# Altium PCB PCB2.PcbDoc (part 1 of 3)
Units mil, origin at the board's own origin, x right, y up, seen from the top; angles counter-clockwise.
Board outline 9010 x 4600 mil, 2 copper layers (Top Layer, Bottom Layer); 234 components, 289 nets, 937 pads, 186 vias.
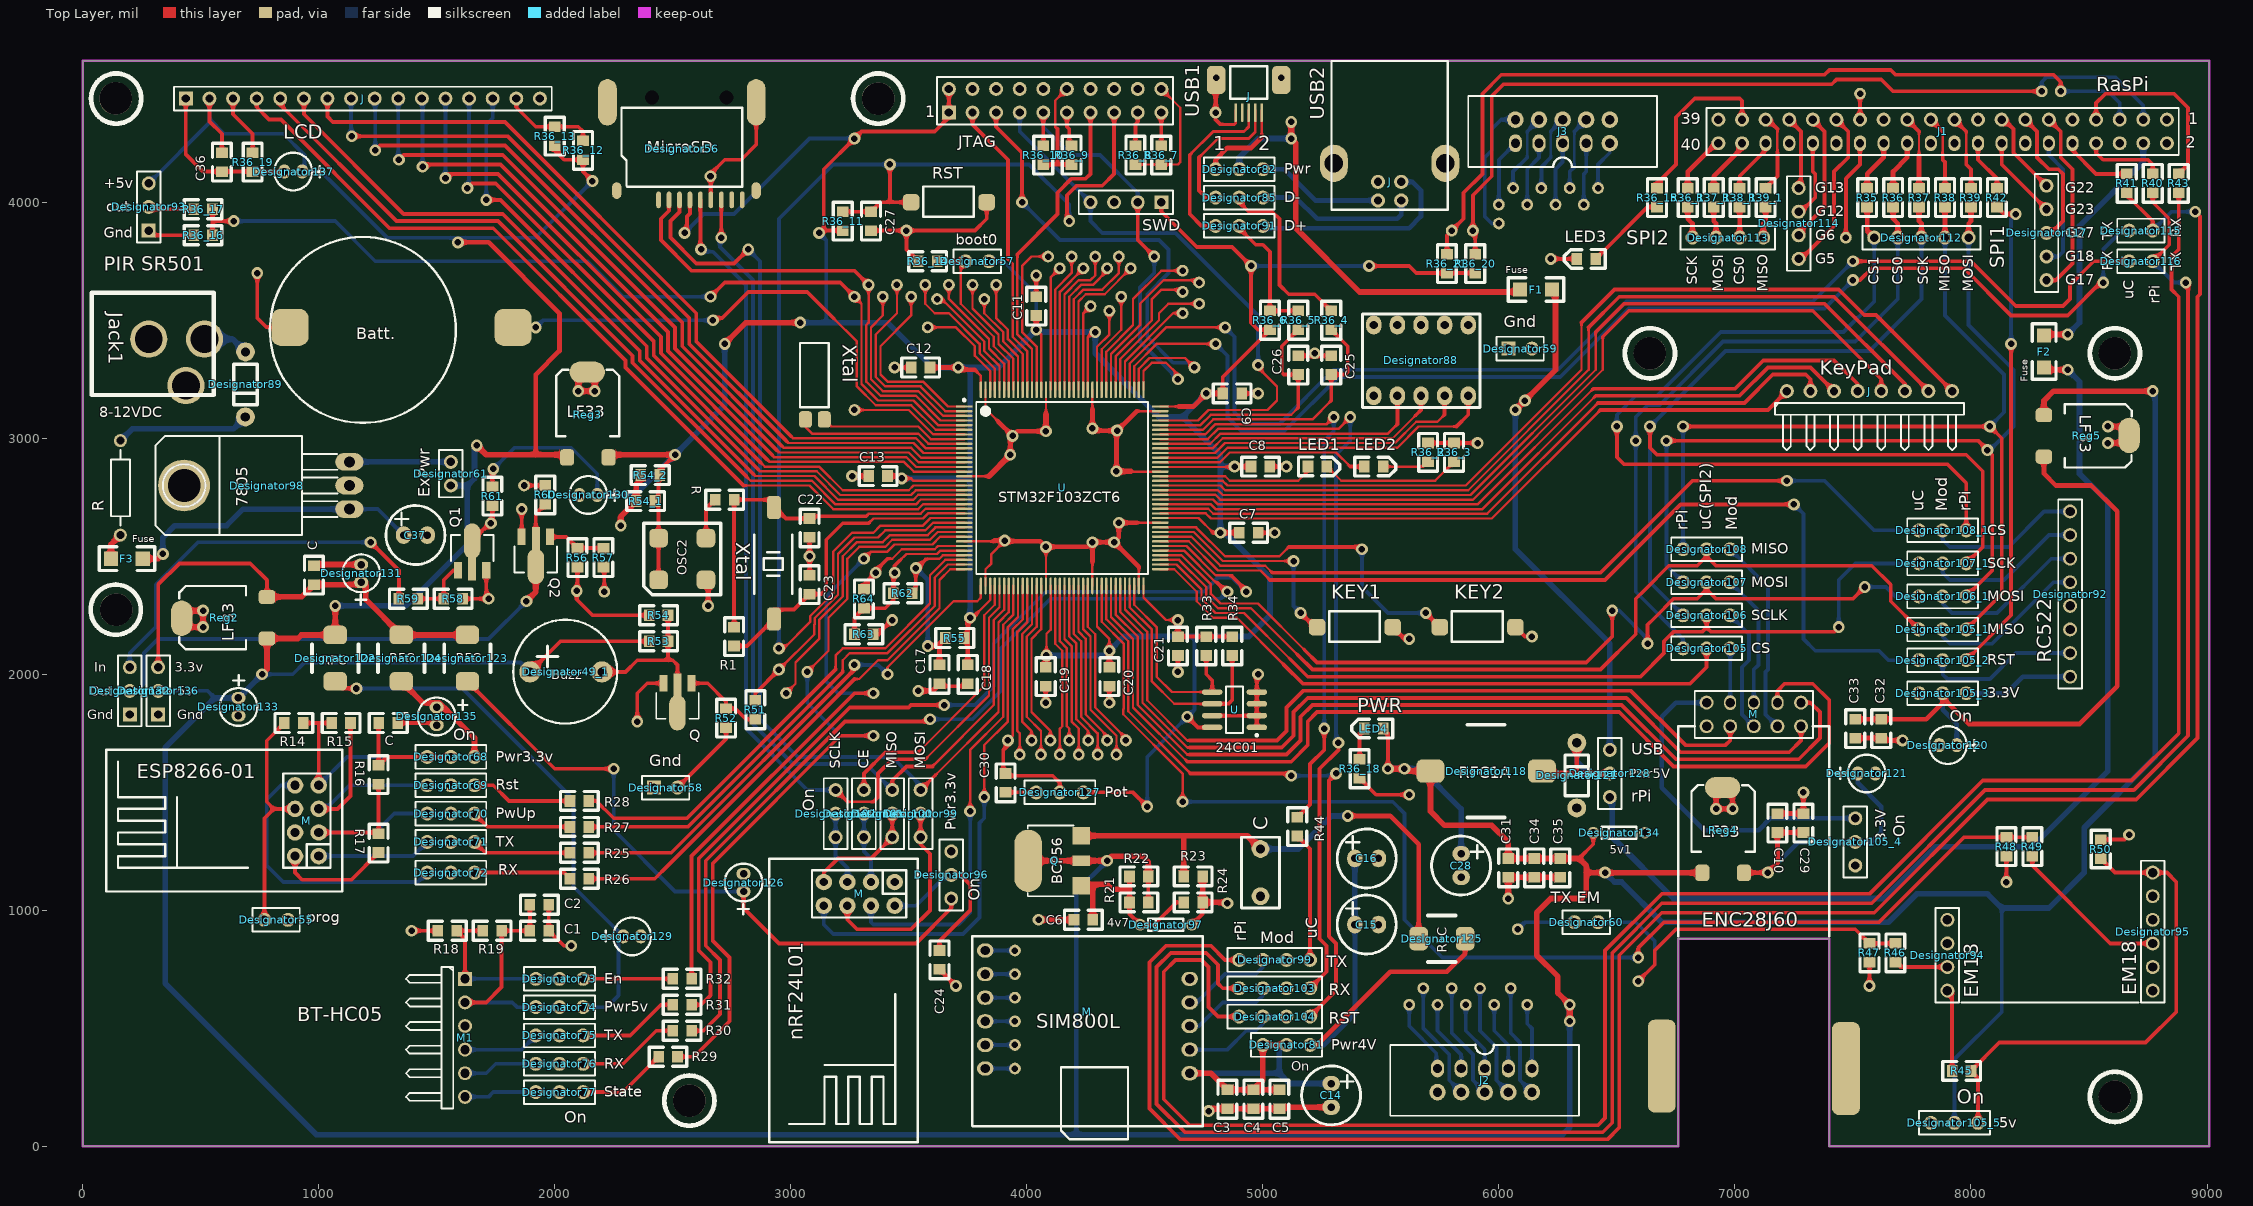
[diagram p0: Top Layer view]
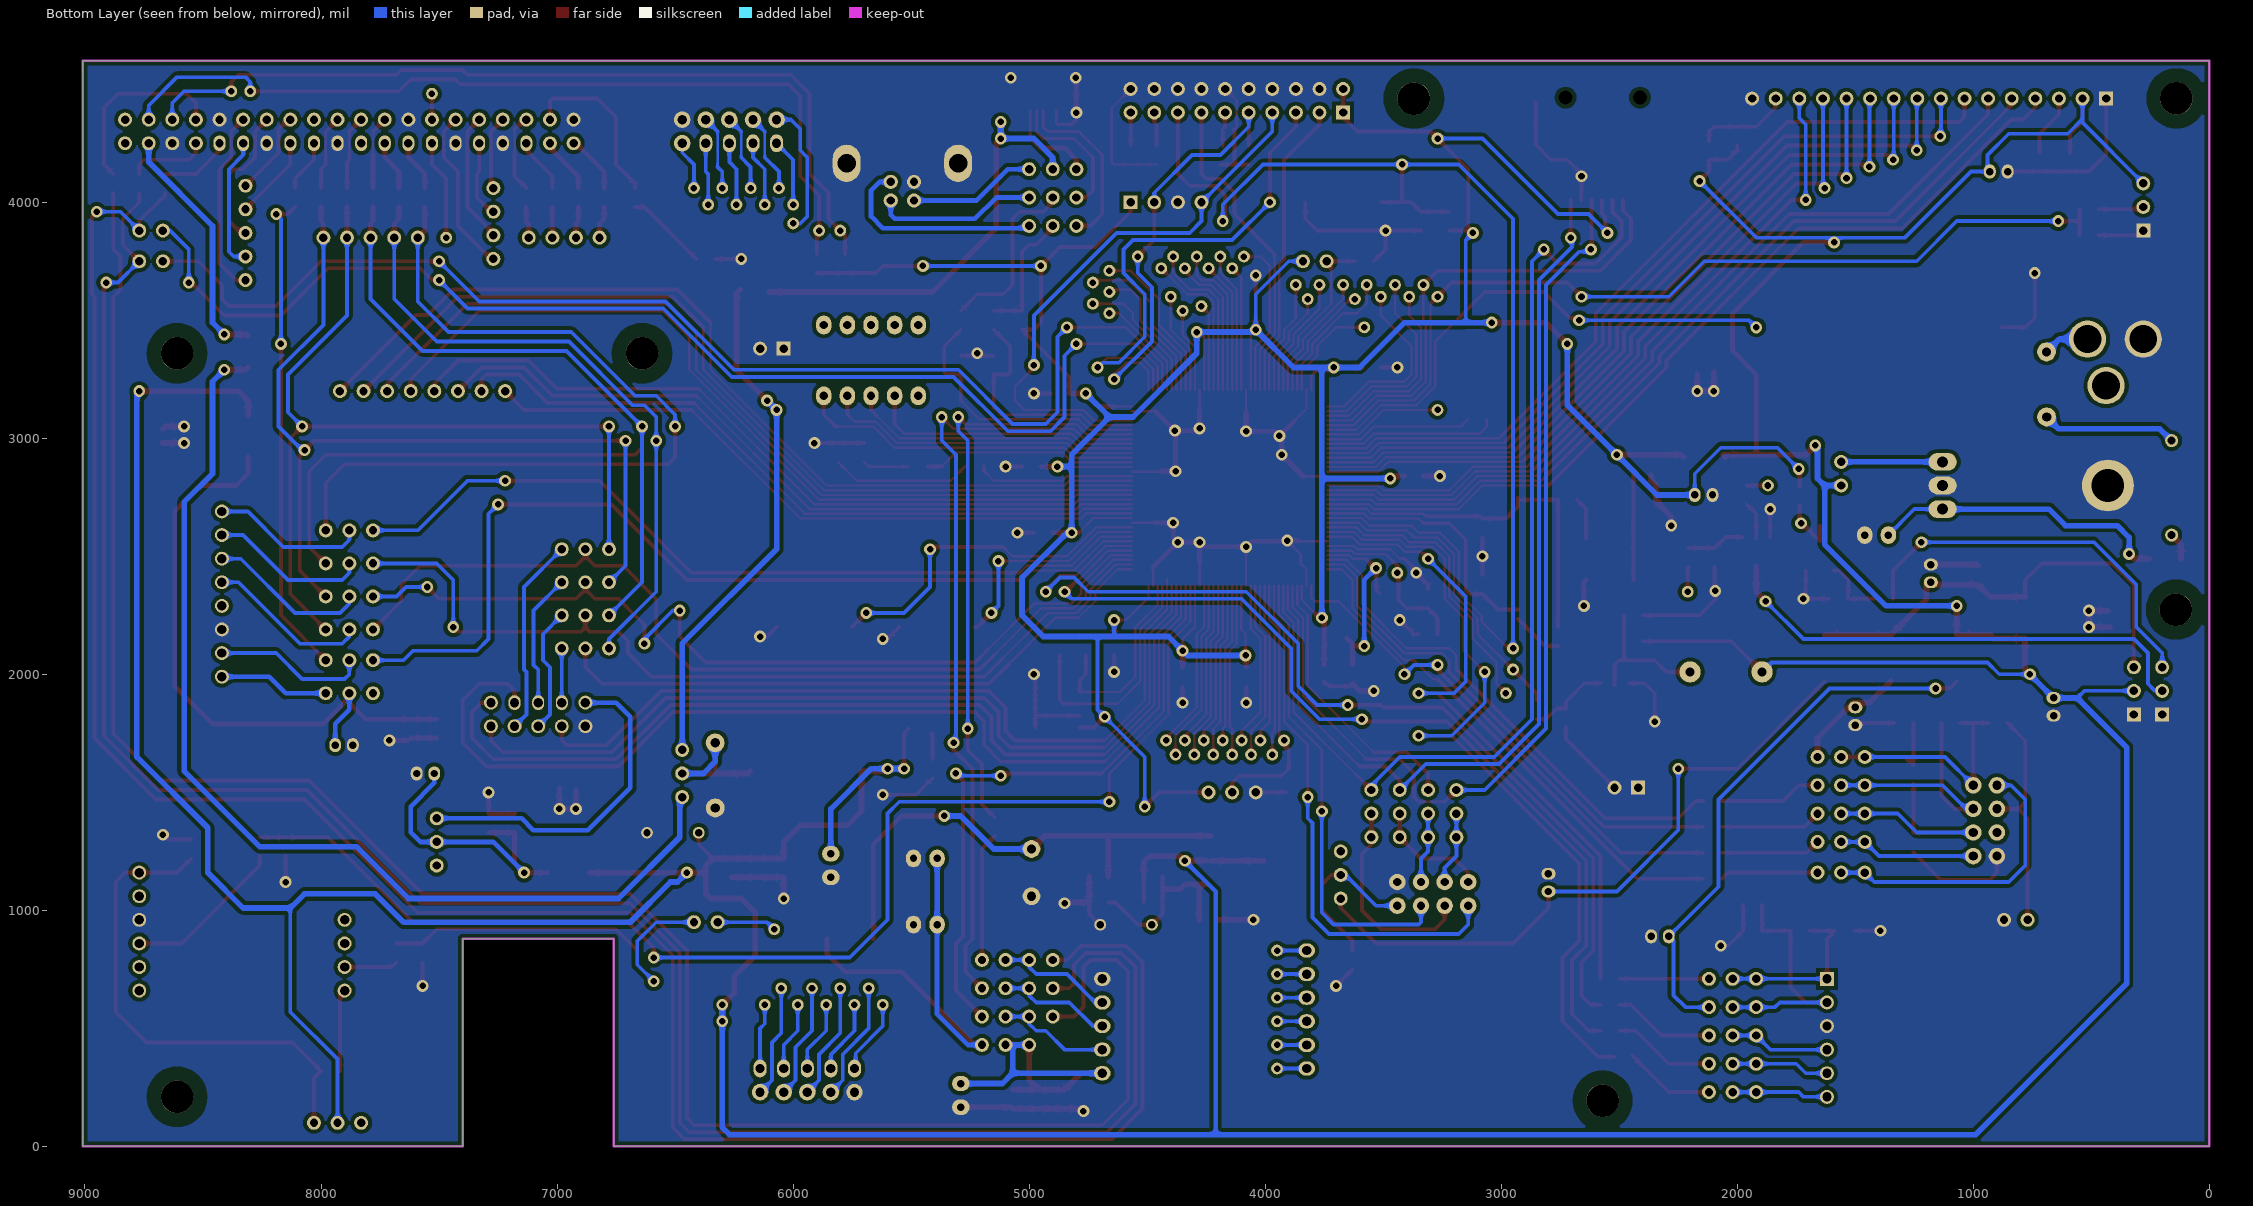
[diagram p1: Bottom Layer view, seen from below]

## Layer stack, top to bottom
Top Solder: solder mask 0.4, Solder Resist, Dk 3.5
Top Layer: signal copper 1.4
Dielectric 1: dielectric 12.6, FR-4, Dk 4.8
Bottom Layer: signal copper 1.4
Bottom Solder: solder mask 0.4, Solder Resist, Dk 3.5

## Board outline
0,0 0,4600 9010,4600 9010,0 7400,0 7400,880 6760,880 6760,0 0,0

## Design rules (kind name [scope] priority, off if disabled: settings)
AssemblyTestPointUsage [All] p1: allowmultiple=TRUE
Clearance PolygonHoldersClearance [InNetClass('Holders')] p1: gap=59.06
Clearance PolygonClearance [InNet('Ground') And OnLayer('Bottom Layer')] p2: gap=16
Clearance [All] p3: gap=9
HoleSize [All] p1: absolutevalues=TRUE maxlimit=500 minlimit=1 maxpercent=80.000 minpercent=20.000
HoleToHoleClearance [All] p1: gap=20 allowstackedmicrovias=TRUE
MinimumSolderMaskSliver [All] p1: minsoldermaskwidth=0
NetAntennae [All] p1: netantennaetolerance=5
PolygonConnect [All] p1: connectstyle=Direct reliefconductorwidth=16 reliefentries=4 polygonreliefangle="90 Angle" airgapwidth=10
RoutingVias [All] p1: holewidth=28 width=50 viastyle="Through Hole" minholewidth=28 minwidth=50 maxholewidth=28 maxwidth=50
SilkToSilkClearance [All] p1: silktosilkclearance=1
SilkToSolderMaskClearance [IsPad] p1: minsilkscreentomaskgap=0 clearancetoexposedcopper=TRUE
SolderMaskExpansion [All] p1: expansion=2
UnpouredPolygon [All] p1: allowunpoured=FALSE
Width [All] p1: maxlimit=100 minlimit=10 preferedwidth=10
22 further rules are at their usual default settings.

## Classes and differential pairs
net class Holders: holder1 holder2 holder3 holder4 holder5 holder6 holder7 holder8

## Components (designator, comment, footprint, x,y, rotation, side; value= is the part's Value field where it differs from the comment)
Batt. "Comment" Batt_holder_smd2 800,3470 r0 top
C "22R" SMD0805 1254.88,1793.86 r0 top
C "22R" SMD0805 980,2380 r90 top
C "Comment" MKT_2 4990,1260 r270 top
C1 "22R" SMD0805 1894.88,913.86 r0 top
C2 "22R" SMD0805 1894.88,1023.86 r0 top
C3 "22R" SMD0805 4850,240 r270 top
C4 "22R" SMD0805 4960,240 r270 top
C5 "22R" SMD0805 5070,240 r270 top
C6 "22R" SMD0805 4200,960 r0 top
C7 "22R" SMD0805 4980,2600 r180 top
C8 "22R" SMD0805 4950,2880 r0 top
C9 "22R" SMD0805 4910,3190 r180 top
C10 "22R" SMD0805 7180,1410 r270 top
C11 "22R" SMD0805 4040,3600 r270 top
C12 "22R" SMD0805 3590,3300 r180 top
C13 "22R" SMD0805 3330,2840 r0 top
C14 "Comment" CAP_1.0 5289.33,216.34 r270 top
C15 "Comment" CAP_1.0 5440,940 r0 top
C16 "Comment" CAP_1.0 5440,1220 r0 top
C17 "22R" SMD0805 3630,2040 r270 top
C18 "22R" SMD0805 3750,1960 r90 top
C19 "22R" SMD0805 4080,1950 r90 top
C20 "22R" SMD0805 4350,1950 r90 top
C21 "22R" SMD0805 4640,2080 r90 top
C22 "22R" SMD0805 3080,2580 r90 top
C23 "22R" SMD0805 3080,2340 r90 top
C24 "22R" SMD0805 3630,750 r90 top
C25 "47p" SMD0805 5290,3350 r270 top
C26 "47p" SMD0805 5150,3350 r270 top
C27 "100nF" SMD0805 3340,3960 r270 top
C28 "Comment" CAP_1.0 5840,1190 r270 top
C29 "22R" SMD0805 7290,1410 r270 top
C30 "22R" SMD0805 3910,1500 r90 top
C31 "22R" SMD0805 6040,1220 r270 top
C32 "22R" SMD0805 7620,1730 r90 top
C33 "22R" SMD0805 7510,1730 r90 top
C34 "22R" SMD0805 6150,1220 r270 top
C35 "22R" SMD0805 6260,1220 r270 top
C36 "22R" SMD0805 590,4130 r90 top
C37 "Comment" CAP_1.0 1410,2590 r0 top
Designator49_1 "Buzz" BUZZER 2160,2010 r270 top
Designator55 "prog" HDR1X2#1 770,960 r0 top
Designator56 "MicroSD" microSD 2440,4010 r0 top
Designator57 "boot0" HDR1X2#1 3740,3750 r0 top
Designator58 "Gnd" HDR1X2#2 2420,1520 r0 top
Designator59 "Gnd" HDR1X2#2 6040,3380 r0 top
Designator60 "TX EM" HDR1X2#1 6320,950 r0 top
Designator61 "ExPwr" HDR1X2#1 1560,2800 r90 top
Designator68 "Pwr3.3v" HDR1X3#1 1460,1650 r0 top
Designator69 "Rst" HDR1X3#1 1460,1530 r0 top
Designator70 "PwUp" HDR1X3#1 1460,1410 r0 top
Designator71 "TX" HDR1X3#1 1460,1290 r0 top
Designator72 "RX" HDR1X3#1 1460,1160 r0 top
Designator73 "En" HDR1X3#1 1920,710 r0 top
Designator74 "Pwr5v" HDR1X3#1 1920,590 r0 top
Designator75 "TX" HDR1X3#1 1920,470 r0 top
Designator76 "RX" HDR1X3#1 1920,350 r0 top
Designator77 "State" HDR1X3#1 1920,230 r0 top
Designator81 "Pwr4V" HDR1X3#1 5000,430 r0 top
Designator82 "Pwr" HDR1X3#1 4800,4140 r0 top
Designator85 "D-" HDR1X3#1 4800,4020 r0 top
Designator88 "Comment" DIPSW5 5470,3480 r0 top
Designator89 "Comment" Diode 690,3090 r180 top
Designator91 "D+" HDR1X3#1 4800,3900 r0 top
Designator92 "RC522" HDR1X8 8420,1990 r90 top
Designator93 "PIR SR501" HDR1X3#2 280,3880 r90 top
Designator94 "EM18" HDR1X4#1 7900,660 r90 top
Designator95 "EM18" HDR1X6 8770,660 r90 top
Designator96 "Pwr3.3v" HDR1X3#1 3680,1050 r90 top
Designator97 "4v7" zener 4590,940 r90 top
Designator98 "7805" TO-220 1130,2800 r90 top
Designator99 "MOSI" HDR1X3#1 3550,1310 r90 top
Designator99 "TX" HDR1X4#2 4900,790 r0 top
Designator100 "MISO" HDR1X3#1 3430,1310 r90 top
Designator101 "CE" HDR1X3#1 3310,1310 r90 top
Designator102 "SCLK" HDR1X3#1 3190,1310 r90 top
Designator103 "RX" HDR1X4#2 4900,670 r0 top
Designator104 "RST" HDR1X4#2 4900,550 r0 top
Designator105 "CS" HDR1X3#1 6780,2110 r0 top
Designator105_1 "MISO" HDR1X3#1 7780,2190 r0 top
Designator105_2 "RST" HDR1X3#1 7780,2060 r0 top
Designator105_3 "3.3V" HDR1X3#1 7780,1920 r0 top
Designator105_4 "3.3V" HDR1X3#1 7510,1190 r90 top
Designator105_5 "5v" HDR1X3#1 7830,100 r0 top
Designator106 "SCLK" HDR1X3#1 6780,2250 r0 top
Designator106_1 "MOSI" HDR1X3#1 7780,2330 r0 top
Designator107 "MOSI" HDR1X3#1 6780,2390 r0 top
Designator107_1 "SCK" HDR1X3#1 7780,2470 r0 top
Designator108 "MISO" HDR1X3#1 6780,2530 r0 top
Designator108_1 "CS" HDR1X3#1 7780,2610 r0 top
Designator112 "SPI1" HDR1X5 7590,3850 r0 top
Designator113 "SPI2" HDR1X4#2 6820,3850 r0 top
Designator114 "Comment" HDR1X4#2 7270,3760 r90 top
Designator115 "Comment" HDR1X2#1 8670,3880 r0 top
Designator116 "Comment" HDR1X2#1 8670,3750 r0 top
Designator117 "Comment" HDR1X5 8320,3670 r90 top
Designator118 "RFC1A" L_RFC_1A_100uH 5710,1590 r0 top
Designator120 "Comment" CAP_75 7940,1700 r180 top
Designator121 "Comment" CAP_75 7520,1580 r0 top
Designator121 "Comment" Diode 6330,1710 r0 top
Designator122 "RFC" L_RFC_0.5A_100uH 1070,1970 r90 top
Designator123 "RFC" L_RFC_0.5A_100uH 1630,1970 r90 top
Designator124 "RFC" L_RFC_0.5A_100uH 1350,1970 r90 top
Designator125 "RFC" L_RFC_0.5A_100uH 5660,880 r0 top
Designator126 "Comment" CAP_75 2800,1080 r90 top
Designator127 "Pot" HDR1X3#1 4040,1500 r0 top
Designator128 "Pwr5V" HDR1X3#1 6470,1480 r90 top
Designator129 "Comment" CAP_75 2290,890 r0 top
Designator130 "Comment" CAP_75 2180,2760 r180 top
Designator131 "Comment" CAP_75 1180,2390 r90 top
Designator132 "Comment" HDR1X3#3 200,1830 r90 top
Designator133 "Comment" CAP_75 660,1900 r270 top
Designator134 "5v1" zener 6510,1330 r90 top
Designator135 "Comment" CAP_75 1500,1860 r270 top
Designator136 "Comment" HDR1X3#3 320,1830 r90 top
Designator137 "Comment" CAP_75 930,4130 r180 top
F1 "Fuse" 1206 6090,3630 r0 top
F2 "Fuse" 1206 8310,3300 r90 top
F3 "Fuse" 1206 120,2490 r0 top
J "USB1" Micro_USB 4940,4380 r270 top
J "USB2" USB-TypeB-Female 5980,4480 r180 top
J "KeyPad" HDR1X8H 7220,3200 r0 top
J "LCD" HDR1X16 437.32,4439.37 r0 top
J1 "RasPi" HDR2X20 8830,4350 r180 top
J2 "P.1" BH10#1 6140,330 r0 top
J3 "P.1" BH10#2 6070,4250 r180 top
Jack1 "8-12VDC" JACK_adaptor 280,3420 r270 top
JTAG "Comment" HDR2X10 3670,4380 r0 top
KEY1 "Comment" MicroSW_smd 5230,2200 r0 top
KEY2 "Comment" MicroSW_smd 5750,2200 r0 top
LED1 "Red" LED805 5191.22,2880.83 r0 top
LED2 "Blue" LED805 5430,2880 r0 top
LED3 "Red" LED805 6410,3760 r180 top
LED4 "PWR" LED805 5510,1770 r180 top
M "nRF24L01" nRF24L01 3440,1120 r270 top
M "SIM800L" SIM800L 4690,710 r180 top
M "ENC28J60" HDR2X5 6880,1780 r0 top
M "ESP8266-01" ESP8266 1000,1230 r180 top
M1 "BT-HC05" HDR1X6H 1620,710 r270 top
OSC2 "12MHz" OSC 2440,2400 r0 top
Q "Comment" SOT89 2520,1962 r180 top
Q "BCP56" SOT-223 4230,1210 r90 top
Q1 "Comment" SOT89 1650,2440 r0 top
Q2 "Comment" SOT89 1920,2582 r180 top
R "Comment" AXIAL-0.4 160,2790 r90 top
R "22R" SMD0805 2680,2740 r0 top
R1 "22R" SMD0805 2760,2120 r90 top
R14 "22R" SMD0805 854.88,1793.86 r0 top
R15 "22R" SMD0805 1054.88,1793.86 r0 top
R16 "22R" SMD0805 1253.86,1615.12 r270 top
R17 "22R" SMD0805 1253.86,1325.12 r270 top
R18 "22R" SMD0805 1504.88,913.86 r0 top
R19 "22R" SMD0805 1694.88,913.86 r0 top
R21 "22R" SMD0805 4434.88,1033.86 r0 top
R22 "22R" SMD0805 4434.88,1143.86 r0 top
R23 "22R" SMD0805 4664.88,1143.86 r0 top
R24 "22R" SMD0805 4664.88,1033.86 r0 top
R25 "22R" SMD0805 2064.88,1243.86 r0 top
R26 "22R" SMD0805 2064.88,1133.86 r0 top
R27 "22R" SMD0805 2064.88,1353.86 r0 top
R28 "22R" SMD0805 2064.88,1463.86 r0 top
R29 "22R" SMD0805 2440,380 r0 top
R30 "22R" SMD0805 2500,490 r0 top
R31 "22R" SMD0805 2500,600 r0 top
R32 "22R" SMD0805 2500,710 r0 top
R33 "22R" SMD0805 4760,2080 r90 top
R34 "22R" SMD0805 4870,2080 r90 top
R35 "22R" SMD0805 7560,3980 r90 top
R36 "22R" SMD0805 7670,3980 r90 top
R36_1 "22R" SMD0805 6800,3980 r90 top
R36_2 "22R" SMD0805 5700,2900 r90 top
R36_3 "22R" SMD0805 5810,2900 r90 top
R36_4 "22R" SMD0805 5290,3460 r90 top
R36_5 "22R" SMD0805 5150,3460 r90 top
R36_6 "1K5" SMD0805 5030,3460 r90 top
R36_7 "10k" SMD0805 4570,4240 r270 top
R36_8 "10k" SMD0805 4460,4240 r270 top
R36_9 "10k" SMD0805 4190,4240 r270 top
R36_10 "10k" SMD0805 4070,4240 r270 top
R36_11 "10k" SMD0805 3220,3960 r270 top
R36_12 "22R" SMD0805 2120,4260 r270 top
R36_13 "22R" SMD0805 2000,4320 r270 top
R36_14 "1k" SMD0805 3540,3750 r0 top
R36_15 "22R" SMD0805 6670,3980 r90 top
R36_16 "22R" SMD0805 550,3860 r180 top
R36_17 "22R" SMD0805 550,3970 r180 top
R36_18 "22R" SMD0805 5410,1560 r90 top
R36_19 "22R" SMD0805 720,4210 r270 top
R36_20 "22R" SMD0805 5900,3700 r90 top
R36_21 "22R" SMD0805 5780,3700 r90 top
R37 "22R" SMD0805 7780,3980 r90 top
R37_1 "22R" SMD0805 6910,3980 r90 top
R38 "22R" SMD0805 7890,3980 r90 top
R38_1 "22R" SMD0805 7020,3980 r90 top
R39 "22R" SMD0805 8000,3980 r90 top
R39_1 "22R" SMD0805 7130,3980 r90 top
R40 "22R" SMD0805 8770,4040 r90 top
R41 "22R" SMD0805 8660,4040 r90 top
R42 "22R" SMD0805 8110,3980 r90 top
R43 "22R" SMD0805 8880,4040 r90 top
R44 "22R" SMD0805 5146.14,1314.88 r90 top
R45 "22R" SMD0805 8000,320 r180 top
R46 "22R" SMD0805 7680,780 r90 top
R47 "22R" SMD0805 7570,780 r90 top
R48 "22R" SMD0805 8150,1230 r90 top
R49 "22R" SMD0805 8260,1230 r90 top
R50 "22R" SMD0805 8550,1220 r90 top
R51 "22R" SMD0805 2850,1810 r90 top
R52 "22R" SMD0805 2726.14,1774.88 r90 top
R53 "22R" SMD0805 2400,2140 r0 top
R54 "22R" SMD0805 2400,2250 r0 top
R54_1 "22R" SMD0805 2344.88,2733.86 r0 top
R54_2 "22R" SMD0805 2364.88,2843.86 r0 top
R55 "22R" SMD0805 3654.88,2153.86 r0 top
R56 "22R" SMD0805 2096.14,2454.88 r90 top
R57 "22R" SMD0805 2206.14,2454.88 r90 top
R58 "22R" SMD0805 1610,2320 r180 top
R59 "22R" SMD0805 1420,2320 r180 top
R60 "22R" SMD0805 1960,2800 r270 top
R61 "22R" SMD0805 1736.14,2714.88 r90 top
R62 "22R" SMD0805 3434.88,2343.86 r0 top
R63 "22R" SMD0805 3270,2170 r0 top
R64 "22R" SMD0805 3310,2280 r90 top
Reg2 "LF33" DPAK 410,2240 r90 top
Reg3 "LF33" DPAK 2140,3290 r0 top
Reg4 "LF33" DPAK 6950,1530 r0 top
Reg5 "LF33" DPAK 8680,3010 r270 top
RST "Comment" MicroSW_smd 3510,4000 r0 top
SWD "Comment" HDR1X4#3 4570,4000 r180 top
U "STM32F103ZCT6" STM-LQFP144_N 4150,2790 r0 top
U "24C01" SO8_N 4880,1850 r180 top
Xtal "Comment" XTAL 3140,3080 r270 top
Xtal "12MHz" XTAL_SMD 2870,2510 r270 top

## Footprints (in the part's own frame and the unit in brackets; to place one, negate y for a bottom-side part, rotate by r counter-clockwise, add the part's x,y. Pads: shape width x height; smd on the part's side, far side on the other; paste and mask are expansions set on the pad)
1206 [mil]
  rect 60x60 smd: 1(0,0) 2(135,0)
  silkscreen extent -50,-50 185,50
AXIAL-0.4 [mm] "Axial Device, Thru-Hole; 2 Leads; 0.4 in Pin Spacing"
  round 1.4 hole 0.85: 1(-5.08,0) 2(5.08,0)
  silkscreen extent -4.06,-1.02 4.06,1.02
Batt_holder_smd2 [mm]
  rrect50% 4x4 smd: MINUS(2,0) PLUS(26,0)
  silkscreen extent -0.17,-10.28 19.83,9.72
BH10#1 [mil]
  round 70 hole 39.37: 1(-400,-100) 3.3V(-300,-100) 5(-200,-100) 7(-100,-100) 9(0,-100)
  oval 55x75 hole 39.37: 4(-300,0) 5V(-400,0) 6(-200,0) 8(-100,0) 10(0,0)
  silkscreen extent -600,-200 200,100
BH10#2 [mil]
  round 70 hole 39.37: 1(-400,-100) 2(-400,0) 3(-300,-100) 5(-200,-100) 7(-100,-100) 9(0,-100)
  oval 55x75 hole 39.37: 4(-300,0) 6(-200,0) 8(-100,0) 10(0,0)
  silkscreen extent -600,-200 200,100
BUZZER [mil]
  round 90 hole 39.37: 1(0,40) 2(0,-265)
  silkscreen extent -221,-335 218,105
CAP_1.0 [mil]
  oval 65x75 hole 31.5: 2(-50,0) 3(50,0)
  silkscreen extent -125,-125 125,125
CAP_75 [mil]
  oval 50x60 hole 31.5: 0(75,0) 1(0,0)
  silkscreen extent -96,-80 118,80
Diode [mil]
  round 80 hole 39.37: A(0,-276) K(0.43,-0.4)
  silkscreen extent -50,-224 50,-52
DIPSW5 [mil]
  oval 65x80 hole 35.43: 0(0,0) 1(100,0) 2(200,0) 3(300,0) 4(400,0) 5(400,-300) 6(300,-300) 7(200,-300) 8(100,-300) 9(0,-300)
  silkscreen extent -48,-350 450,47
DPAK [mil]
  oval 150x90 smd: 0(-2.2,-9.65)
  rrect50% 60x70 smd: In(-88,-371) Out(88,-371)
  silkscreen extent -134,-282 134,1
ESP8266 [mil]
  round 70 hole 39.37: 3.3V(0,-300) CH_PD(0,-100) GND(100,0) GPIO0(100,-200) GPIO2(100,-100) RST(0,-200) RXD(100,-300) TXD(0,0)
  silkscreen extent -100,-450 900,150
HDR1X2#1 [mm] "Connector; Header; 2 Position"
  round 1.5 hole 0.9: 1(0,0) 2(2.54,0)
  silkscreen extent -1.27,-1.27 3.81,1.27
HDR1X2#2 [mm] "Connector; Header; 2 Position"
  rect 1.5x1.5 hole 0.9: 1(0,0)
  round 1.5 hole 0.9: 2(2.54,0)
  silkscreen extent -1.27,-1.27 3.81,1.27
HDR1X3#1 [mm] "Connector; Header; 3 Position"
  round 1.5 hole 0.9: 1(0,0) 2(2.54,0) 3(5.08,0)
  silkscreen extent -1.27,-1.27 6.35,1.27
HDR1X3#2 [mm] "Connector; Header; 3 Position"
  rect 1.5x1.5 hole 0.9: Gnd(0,0)
  round 1.5 hole 0.9: Out(2.54,0) Vcc5V(5.08,0)
  silkscreen extent -1.27,-1.27 6.35,1.27
HDR1X3#3 [mm] "Connector; Header; 3 Position"
  rect 1.5x1.5 hole 0.9: 1(0,0)
  round 1.5 hole 0.9: 2(2.54,0) 3(5.08,0)
  silkscreen extent -1.27,-1.27 6.35,1.27
HDR1X4#1 [mm] "Connector; Header; 4 Position"
  round 1.5 hole 1: D0(7.62,0) D1(5.08,0) Sel(0,0) TX(2.54,0)
  silkscreen extent -1.27,-1.27 8.89,1.27
HDR1X4#2 [mm] "Connector; Header; 4 Position"
  round 1.5 hole 0.9: 1(0,0) 2(2.54,0) 3(5.08,0) 4(7.62,0)
  silkscreen extent -1.27,-1.27 8.89,1.27
HDR1X4#3 [mm] "Connector; Header; 4 Position"
  round 1.5 hole 0.9: GND(5.08,0) SWCLK(2.54,0) SWDIO(7.62,0)
  rect 1.5x1.5 hole 0.9: VDD(0,0)
  silkscreen extent -1.27,-1.27 8.89,1.27
HDR1X5 [mm] "Connector; Header; 5 Position"
  round 1.5 hole 0.9: 1(0,0) 2(2.54,0) 3(5.08,0) 4(7.62,0) 5(10.16,0)
  silkscreen extent -1.27,-1.27 11.43,1.27
HDR1X6 [mm] "Connector; Header; 6 Position"
  round 1.5 hole 1: 1(0,0) Beep(5.08,0) Gnd(7.62,0) NC(2.54,0) NC(10.16,0) Vcc5v(12.7,0)
  silkscreen extent -1.27,-1.27 13.97,1.27
HDR1X6H [mm] "Connector; Header; 6 Position; Right Angle"
  round 1.5 hole 1: 5V(2.54,0) Gnd(5.08,0) RXD(10.16,0) State(12.7,0) TXD(7.62,0)
  rect 1.5x1.5 hole 1: En(0,0)
  silkscreen extent -1.27,-6.35 13.97,-1.27
HDR1X8 [mm] "Connector; Header; 8 Position"
  round 1.5 hole 1: CS(17.78,0) Gnd(5.08,0) IRQ(7.62,0) MISO(10.16,0) MOSI(12.7,0) RST(2.54,0) SCK(15.24,0) Vcc3.3V(0,0)
  silkscreen extent -1.27,-1.27 19.05,1.27
HDR1X8H [mm] "Connector; Header; 8 Position; Right Angle"
  round 1.5 hole 0.9: Col1(10.16,0) Col2(12.7,0) Col3(15.24,0) Col4(17.78,0) Row1(0,0) Row2(2.54,0) Row3(5.08,0) Row4(7.62,0)
  silkscreen extent -1.27,-6.35 19.05,-1.27
HDR1X16 [mm] "Connector; Header; 16 Position"
  round 1.5 hole 0.9: BLA(35.56,0) BLK(38.1,0) DB0(15.24,0) DB1(17.78,0) DB2(20.32,0) DB3(22.86,0) DB4(25.4,0) DB5(27.94,0) DB6(30.48,0) DB7(33.02,0) E(12.7,0) R/W(10.16,0) RS(7.62,0) vcc(2.54,0) Vee(5.08,0)
  rect 1.5x1.5 hole 0.9: gnd(0,0)
  silkscreen extent -1.27,-1.27 39.37,1.27
HDR2X5 [mm] "Connector; Header; 5x2 Position"
  round 1.5 hole 1: CLK(10.16,2.54) GND(0,0) INT(10.16,0) RST(2.54,0) SCK(5.08,0) SO(7.62,0) VCC3.3v(0,2.54)
  oval 1.3x1.6 hole 1: CS(2.54,2.54) SI(5.08,2.54) WOL(7.62,2.54)
  silkscreen extent -1.27,-1.27 11.43,3.81
HDR2X10 [mm] "Connector; Header; 10x2 Position"
  round 1.5 hole 0.9: gnd(2.54,2.54) gnd(5.08,2.54) gnd(7.62,2.54) gnd(10.16,2.54) gnd(12.7,2.54) gnd(15.24,2.54) gnd(17.78,2.54) gnd(20.32,2.54) gnd(22.86,2.54) NRST(17.78,0) pullDown(12.7,0) pulldown(20.32,0) pullDown(22.86,0) TCLK--SWCLK-pulldown(10.16,0) TDI(5.08,0) TDO(15.24,0) TMS-SWDIO(7.62,0) TRST(2.54,0) Vcc(0,2.54)
  rect 1.5x1.5 hole 0.9: Vcc(0,0)
  silkscreen extent -1.27,-1.27 24.13,3.81
HDR2X20 [mm] "Connector; Header; 20x2 Position"
  round 1.5 hole 0.9: 3.3v(0,0) 3.3v(20.32,0) 5v(0,2.54) 5v(2.54,2.54) Gnd(5.08,2.54) Gnd(10.16,0) Gnd(30.48,0) Gnd(48.26,0) GPIO2-SDA(2.54,0) GPIO3-SCL(5.08,0) GPIO4(7.62,0) GPIO5(35.56,0) GPIO6(38.1,0) GPIO9-MISO(25.4,0) GPIO10-MOSI(22.86,0) GPIO11-SCLK(27.94,0) GPIO13(40.64,0) GPIO14-TX(7.62,2.54) GPIO17(12.7,0) GPIO19-MISO(43.18,0) GPIO20-MOSI(45.72,2.54) GPIO21-SCLK(48.26,2.54) GPIO22(17.78,0) GPIO26(45.72,0) GPIO27(15.24,0) ID_SD(33.02,0)
  oval 1.3x1.7 hole 0.9: Gnd(15.24,2.54) Gnd(22.86,2.54) Gnd(35.56,2.54) GND(40.64,2.54) GPIO7-CE1(30.48,2.54) GPIO8-CE0(27.94,2.54) GPIO12(38.1,2.54) GPIO15-RX(10.16,2.54) GPIO16-CE0(43.18,2.54) GPIO18(12.7,2.54) GPIO23(17.78,2.54) GPIO24(20.32,2.54) GPIO25(25.4,2.54) ID_SC(33.02,2.54)
  silkscreen extent -1.27,-1.27 49.53,3.81
JACK_adaptor [mm]
  round 4 hole 3: 0(0,0) 1(0,6) 2(5,4)
  silkscreen extent -5,-6.12 6,7
L_RFC_0.5A_100uH [mm]
  rrect50% 2x2.5 smd: 0(0,0) 0(5,0)
  silkscreen extent 1,-2.5 4,2.5
L_RFC_1A_100uH [mm]
  rrect50% 3x2.5 smd: 0(0,0) 0(12,0)
  silkscreen extent 4,-5 8,5
LED805 [mil]
  rect 45x50 smd: 0(0,0) 0(80,0)
  silkscreen extent -40,-40 134,40
Micro_USB [mm]
  rrect50% 3x2 smd: 1(-3.5,3.5) 1(-3.5,-3.5)
  oval 2x0.3 smd: D+(0,0) D-(0,0.7) Gnd(0,-1.4) ID(0,-0.7) Vcc(0,1.4)
  silkscreen extent -5,-2 -1.5,2
microSD [mm]
  oval 2x5 smd: 0(-5.5,10.5) 0(10.5,10.5)
  oval 1x1.8 smd: 0(-4.5,1) 0(10.5,1)
  round 1 hole 1.5: 1(7.3,11) 2(-0.7,11)
  oval 0.5x1.8 smd: CS(1.125,0) GND(5.625,0) MISO(6.75,0) MOSI(2.25,0) NC(0,0) NC(7.875,0) SCLK(4.5,0) Tamper(9,0) Vdd(3.375,0)
  silkscreen extent -3.99,1.42 9.02,9.91
MicroSW_smd [mil]
  rrect50% 70x70 smd: 1(0,0) 2(320,0)
  silkscreen extent 51,-62 266,67
MKT_2 [mm]
  round 1.905 hole 1: 1(0,0) 2(5.08,0)
  silkscreen extent -1.27,-2.03 6.35,2.03
nRF24L01 [mil]
  round 70 hole 35.43: CE(0,-100) CSN(100,-100) GND(0,0) IRQ(100,-300) MISO(0,-300) MOSI(100,-200) SCK(0,-200) VCC(100,0)
  silkscreen extent -98,-531 1102,98
OSC [mm]
  rrect50% 2x2 smd: En(0,0) Gnd(5.1,0) Out(5.1,4.5) Vdd(0,4.5)
  silkscreen extent -1.6,-1.6 6.7,6.1
SIM800L [mil]
  oval 70x60 hole 39.37: 0(866.14,-120) 0(866.14,-20) 0(866.14,80) 0(866.14,180) 0(866.14,280) DTR(866.14,380) Gnd(0,0) RST(0,300) RXD(0,200) TXD(0,100) Vcc(0,400)
  silkscreen extent -55,-180 921,680
SMD0805 [mil]
  rect 45x50 smd: 0(0,0) 0(80,0)
  silkscreen extent -40,-40 120,40
SO8_N [mm] "SOIC, 8-Leads, Body 4.9x3.9mm, Pitch 1.27mm, IPC Medium Density"
  oval 2.2x0.6 smd: Gnd(-2.4,1.905) Gnd(-2.4,-0.635) Gnd(-2.4,0.635) Gnd(-2.4,-1.905) Gnd(2.4,0.635) SCL(2.4,-0.635) SDA(2.4,-1.905) Vcc(2.4,1.905)
  silkscreen extent -2.53,-2.5 0.9,2.88, body extent -2,-2.5 2,2.5, height 1.75
SOT89 [mil]
  rect 34x70 smd: 1(-60,0) 3(60,0)
  oval 70x150 smd: 1(0,125)
  rect 34x100 smd: 2(0,8)
  silkscreen extent -90,40 90,150
SOT-223 [mm]
  rect 1.9x1.9 smd: B(-2.692,0) E(2.692,0)
  oval 6.7x3 smd: C(0,5.69)
  rect 1.1x1.9 smd: C(0,0)
  Top Layer lines w0.61: 0,5.69 0,0
  silkscreen extent -3.81,0.81 3.81,5.74
STM-LQFP144_N [mm] "Thin QFP, 144-Leads, Body 20x20mm, Pitch 0.5mm, IPC Medium Density"
  oval 0.25x1.8 smd: BOOT0(-5.75,10.55) PA3-USART2RX(-8.75,-10.55) PA4-SPI1NSS(-7.25,-10.55) PA5-SPI1SCK(-6.75,-10.55) PA6-SPI1MISO(-6.25,-10.55) PA7-SPI1MOSI(-5.75,-10.55) PA14-TCK-SWCLK(8.75,10.55) PA15-TDI(8.25,10.55) PB0(-4.25,-10.55) PB1(-3.75,-10.55) PB2(-3.25,-10.55) PB3-TDO(-3.25,10.55) PB4-NJTRST(-3.75,10.55) PB5(-4.25,10.55) PB6(-4.75,10.55) PB7(-5.25,10.55) PB8-I2C1SCL(-6.25,10.55) PB9-I2C1SDA(-6.75,10.55) PB10-I2C2-SCK(7.25,-10.55) PB11-I2C2-SDA(7.75,-10.55) PC4(-5.25,-10.55) PC5(-4.75,-10.55) PC10-UART4-TX(7.75,10.55) PC11-UART4-RX(7.25,10.55) PC12-UART5-TX(6.75,10.55) PD0(6.25,10.55) PD1(5.75,10.55) PD2-UART5-RX(5.25,10.55) PD3(4.75,10.55) PD4(4.25,10.55) PD5(3.75,10.55) PD6(2.25,10.55) PD7(1.75,10.55) PE0(-7.25,10.55) PE1(-7.75,10.55) PE7(1.75,-10.55) PE8(2.25,-10.55) PE9(2.75,-10.55) PE10(4.25,-10.55) PE11(4.75,-10.55) PE12(5.25,-10.55) PE13(5.75,-10.55) PE14(6.25,-10.55) PE15(6.75,-10.55) PF11(-2.75,-10.55) PF12(-2.25,-10.55) PF13(-0.75,-10.55) PF14(-0.25,-10.55) PF15(0.25,-10.55) PG0(0.75,-10.55) PG1(1.25,-10.55) PG9(1.25,10.55) PG10(0.75,10.55) PG11(0.25,10.55) PG12(-0.25,10.55) PG13(-0.75,10.55) PG14(-1.25,10.55) PG15(-2.75,10.55) VDD_1(8.75,-10.55) VDD_3(-8.75,10.55) VDD_4(-7.75,-10.55) VDD_6(-1.25,-10.55) VDD_7(3.75,-10.55) VDD_10(2.75,10.55) VDD_11(-2.25,10.55) VSS_1(8.25,-10.55) VSS_3(-8.25,10.55) VSS_4(-8.25,-10.55) VSS_6(-1.75,-10.55) VSS_7(3.25,-10.55) VSS_10(3.25,10.55) VSS_11(-1.75,10.55)
  oval 1.8x0.25 smd: NC(10.55,7.75) NRST(-10.55,-3.25) OSC_IN(-10.55,-2.25) OSC_OUT(-10.55,-2.75) PA0-WKUP(-10.55,-7.75) PA1(-10.55,-8.25) PA2-USART2TX(-10.55,-8.75) PA8(10.55,4.75) PA9-USART1-TX(10.55,5.25) PA10-USART1-RX(10.55,5.75) PA11-USB-DM(10.55,6.25) PA12-USB-DP(10.55,6.75) PA13-TMS-SWDIO(10.55,7.25) PB12-SPI2NSS(10.55,-8.75) PB13-SPI2-SCK(10.55,-8.25) PB14-SPI2-MISO(10.55,-7.75) PB15-SPI2-MOSI(10.55,-7.25) PC0(-10.55,-3.75) PC1(-10.55,-4.25) PC2(-10.55,-4.75) PC3(-10.55,-5.25) PC6(10.55,2.75) PC7(10.55,3.25) PC8(10.55,3.75) PC9(10.55,4.25) PC13-TAMPER-RTC(-10.55,5.75) PC14-OSC32_IN(-10.55,5.25) PC15-OSC32_OUT(-10.55,4.75) PD8-USART3-TX(10.55,-6.75) PD9-USART3-RX(10.55,-6.25) PD10(10.55,-5.75) PD11(10.55,-5.25) PD12(10.55,-4.75) PD13(10.55,-4.25) PD14(10.55,-2.75) PD15(10.55,-2.25) PE2(-10.55,8.75) PE3(-10.55,8.25) PE4(-10.55,7.75) PE5(-10.55,7.25) PE6(-10.55,6.75) PF0(-10.55,4.25) PF1(-10.55,3.75) PF2(-10.55,3.25) PF3(-10.55,2.75) PF4(-10.55,2.25) PF5(-10.55,1.75) PF6(-10.55,0.25) PF7(-10.55,-0.25) PF8(-10.55,-0.75) PF9(-10.55,-1.25) PF10(-10.55,-1.75) PG2(10.55,-1.75) PG3(10.55,-1.25) PG4(10.55,-0.75) PG5(10.55,-0.25) PG6(10.55,0.25) PG7(10.55,0.75) PG8(10.55,1.25) VBAT(-10.55,6.25) VDD_2(10.55,8.75) VDD_5(-10.55,0.75) VDD_8(10.55,-3.25) VDD_9(10.55,2.25) VDDA(-10.55,-7.25) VREF+(-10.55,-6.75) VREF-(-10.55,-6.25) VSS_2(10.55,8.25) VSS_5(-10.55,1.25) VSS_8(10.55,-3.75) VSS_9(10.55,1.75) VSS_A(-10.55,-5.75)
  silkscreen extent -10.67,-9.25 9.25,9.57, body extent -10,-10 10,10, height 1.6
TO-220 [mil]
  round 220 hole 137.8: 0(0,700)
  oval 75x120 hole 47.24: 1(-100,0) 2(0,0) 3(100,0)
  silkscreen extent -209,50 209,821
USB-TypeB-Female [mm]
  oval 3x4 hole 2: 7(17.25,8) 8(5.25,8)
  round 1.524 hole 0.9: D+(10,10) D-(10,12) gnd(12.5,10) vcc(12.5,12)
  silkscreen extent 5,-3 17.5,13
XTAL [mil]
  rrect50% 70x55 smd: 0(0,2) 0(0,-78)
  silkscreen extent -324,-101 -52,21
XTAL_SMD [mm]
  rrect50% 2.5x1.5 smd: 1(-5,1.5) 2(7,1.5)
  silkscreen extent -2.08,-0.61 4.27,3.45
zener [mil]
  round 50 hole 31.5: 0(-1,110) 1(-1,-109)
  silkscreen extent -27,-73 25,75

## Free pads (board coordinates)
  round 137.8 hole 137.8: 0(140,4440) 0(142.05,2274.02) 0(2570.39,194.02) 0(3370.39,4439.37) 0(6640,3360) 0(8610,210) 0(8610,3360)
  round 50 hole 27.56: 0(1870,2800) 0(2210,2350) 0(2980,1920) 0(3270,3120) 0(3390,3600) 0(3440,2430) 0(3450,3650) 0(3510,3600) 0(3570,3650) 0(3580,3470) 0(3620,3590) 0(3670,3650) 0(3770,3650) 0(3820,3590) 0(3870,3650) 0(3950,330) 0(3950,430) 0(3950,530) 0(3950,630) 0(3950,730) 0(3950,830) 0(3970,1660) 0(4020,1720) 0(4060,1660) 0(4090,3770) 0(4100,1720) 0(4140,1660) 0(4140,3720) 0(4180,1720) 0(4190,3770) 0(4220,1660) 0(4240,3720) 0(4260,1720) 0(4270,3560) 0(4290,3770) 0(4300,1660) 0(4340,1720) 0(4340,3720) 0(4350,3540) 0(4380,1660) 0(4390,3770) 0(4400,3600) 0(4420,1720) 0(4440,3720) 0(4660,3530) 0(4660,3620) 0(4660,3710) 0(4730,3570) 0(4730,3660) 0(5620,600) 0(5680,670) 0(5740,600) 0(5800,670) 0(5860,600) 0(5890,3880) 0(5920,670) 0(5980,600) 0(6000,3910) 0(6000,3990) 0(6050,670) 0(6060,4060) 0(6080,920) 0(6120,600) 0(6120,3990) 0(6180,4060) 0(6240,3990) 0(6300,4060) 0(6360,3990) 0(6420,4060) 0(7470,3850) 0(7530,4460) 0(8300,4470) 0(8380,4470) 1(5800,3880)
  rrect50% 118.11x393.7 smd: 1(6690,340) 1(7470,330)

## Via types
v1: diameter 50, hole 27.56, Top Layer to Bottom Layer, 186 vias

## Nets (pads, with @x,y where several pads share a name; then routed paths per layer and width w, separated by ;. In a path a pad name is that pad's centre, name@x,y a point inside that pad or via, vN(x,y) a via of type N, cw(c..) or ccw(c..) an arc to the next point about the centre after c; other vN are vias at no path point)
Ground: Batt..MINUS C1.0@1974.88,913.86 C2.0@1974.88,1023.86 C3.0@4850,160 C4.0@4960,160 C5.0@5070,160 C6.0@4200,960 C7.0@4980,2600 C8.0@5030,2880 C9.0@4910,3190 C10.0@7180,1410 C11.0@4040,3600 C12.0@3510,3300 C13.0@3330,2840 C14.3 C15.3 C16.3 C17.0@3630,1960 C18.0@3750,1960 C19.0@4080,1950 C20.0@4350,1950 C21.0@4640,2080 C22.0@3080,2580 C23.0@3080,2420 C24.0@3630,750 C25.0@5290,3350 C26.0@5150,3350 C27.0@3340,3880 C28.3 C29.0@7290,1410 C30.0@3910,1500 C31.0@6040,1140 C32.0@7620,1730 C33.0@7510,1730 C34.0@6150,1140 C35.0@6260,1140 C36.0@590,4130 C37.3 C.0@980,2460 C.0@1334.88,1793.86 C.2 Designator55.2 Designator56.0@2853.39,4423.39 Designator56.GND Designator58.1 Designator58.2 Designator59.1 Designator59.2 Designator92.Gnd Designator93.Gnd Designator95.Gnd Designator97.1 Designator98.0 Designator98.2 Designator120.0 Designator121.0 Designator121.A Designator126.0 Designator127.1 Designator129.0 Designator130.0 Designator131.0 Designator132.1 Designator133.0 Designator134.1 Designator135.0 Designator136.1 Designator137.0 J1.Gnd J1.GND J2.1 J3.1 J.1 J.7 J.8 J.BLK J.Gnd J.gnd Jack1.0 JTAG.gnd KEY1.2 KEY2.2 LED3.0@6330,3760 M1.Gnd M.GND M.Gnd OSC2.Gnd Q1.3 Q2.3 Q.3 R17.0@1253.86,1245.12 R18.0@1504.88,913.86 R23.0@4744.88,1143.86 R24.0@4744.88,1033.86 R36_2.0@5700,2980 R36_3.0@5810,2980 R36_7.0@4570,4160 R36_8.0@4460,4160 R36_9.0@4190,4160 R36_10.0@4070,4160 R36_14.0@3540,3750 R36_16.0@470,3860 R36_18.0@5410,1560 R36_19.0@720,4130 R47.0@7570,780 R48.0@8150,1230 R50.0@8550,1300 R52.0@2726.14,1774.88 R54.0@2400,2250 R54_1.0@2344.88,2733.86 R54_2.0@2364.88,2843.86 R56.0@2096.14,2454.88 R58.0@1610,2320 R63.0@3350,2170 R64.0@3310,2360 Reg2.0 Reg3.0 Reg4.0 Reg5.0 RST.2 SWD.GND U.Gnd U.VREF- U.VSS_1 U.VSS_2 U.VSS_3 U.VSS_4 U.VSS_5 U.VSS_6 U.VSS_7 U.VSS_8 U.VSS_9 U.VSS_10 U.VSS_11 U.VSS_A | length 16456.6
  Top Layer w10: 3410,2490 3430,2490 3470,2530 3610,2530 3623.94,2543.94 U.VREF-@3734.65,2543.94 ; U.VSS_A@3734.65,2563.62 3860,2563.62 v1@3903.62,2563.62 ; U.VSS_5@3734.65,2839.21 3839.21,2839.21 ; U.VSS_4@3825.2,2374.65 3825.2,2445.2 3850,2470 3850,2510 v1@3903.62,2563.62 ; U.VSS_3@3825.2,3205.35 3825.2,3124.8 3880,3070 ; v1@3910,2570 v1(3906.81,2566.81) v1@3903.62,2563.62 ; U.VSS_6@4081.1,2374.65 v1(4081.1,2540) ; 4081.1,3101.1 U.VSS_11@4081.1,3205.35 ; 4130,4310 4120,4320 4120,4430 JTAG.gnd@4170,4480 ; U.VSS_7@4277.95,2374.65 4277.95,2477.95 ; 4277.95,3122.05 U.VSS_10@4277.95,3205.35 ; 4440,2860 4441.1,2858.9 U.VSS_9@4565.35,2858.9 ; R36_8.0@4460,4160 R36_7.0@4570,4160 4640,4160 4650,4170 4650,4400 JTAG.gnd@4570,4480 ; 4462.36,2642.36 U.VSS_8@4565.35,2642.36 ; 4464.8,3114.8 U.VSS_2@4565.35,3114.8 ; U.VSS_1@4474.8,2374.65 4474.8,2455.2
  Top Layer w12: 4820,4330 4880,4330 4884.88,4334.88 J.Gnd@4884.88,4380 J.Gnd@4884.88,4390
  Top Layer w16: Designator93.Gnd@280,3880 300,3860 R36_16.0@470,3860 ; J.gnd@437.32,4439.37 437.32,4202.68 510,4130 C36.0@590,4130 R36_19.0@720,4130 Designator137.0@855,4130 ; v1@740,3690 740,3510 780,3470 Batt..MINUS@878.74,3470 ; M.GND@900,1230 900,1160 930,1130 1138.74,1130 R17.0@1253.86,1245.12 ; C.0@1334.88,1793.86 1488.86,1793.86 Designator135.0@1490,1795 ; v1@1390,910 v1(1393.86,913.86) R18.0@1504.88,913.86 ; R58.0@1610,2320 v1(1720,2320) 1710,2330 Q1.3@1710,2440 ; Q2.3@1860,2582 v1(1860,2700) ; C2.0@1974.88,1023.86 C1.0@1974.88,913.86 2038.74,850 v1(2070,850) ; v1@2090,2350 v1(2093.07,2353.07) ; R56.0@2096.14,2454.88 2096.14,2356.14 v1(2093.07,2353.07) ; v1(2350,1800) 2350,1920 2392,1962 Q.3@2460,1962 ; R54.0@2400,2250 2160,2250 2093.07,2316.93 v1(2093.07,2353.07) ; Designator58.2@2520,1520 2726.14,1726.14 R52.0@2726.14,1774.88 ; Designator56.GND@2661.46,4010 2661.46,4108.54 v1(2660,4110) 2660,4120 2720,4180 2790,4180 2853.39,4243.39 Designator56.0@2853.39,4423.39 ; C23.0@3080,2420 v1(3080,2500) C22.0@3080,2580 ; R64.0@3310,2360 3310,2380 v1(3360,2430) 3360,2440 3410,2490 ; C27.0@3340,3880 v1(3490,3880) ; R63.0@3350,2170 3370,2170 v1(3430,2230) ; v1(3440,3300) C12.0@3510,3300 ; R36_14.0@3540,3750 3490,3800 v1(3490,3880) ; C24.0@3630,750 v1(3700,680) ; C17.0@3630,1960 3640,1950 3730,1950 3750,1970 C18.0@3750,1960 ; RST.2@3830,4000 3830,3930 3780,3880 v1(3490,3880) ; C30.0@3910,1500 Designator127.1@4040,1500 ; C11.0@4040,3600 v1(4040,3690) ; R36_10.0@4070,4160 4130,4160 ; v1(4080,1880) C19.0@4080,1950 ; 4130,4310 4130,4160 ; R36_9.0@4190,4160 4130,4160 ; v1(4350,1880) C20.0@4350,1950 ; v1(4640,2010) C21.0@4640,2080 ; Designator97.1@4699,939 4744.88,984.88 R24.0@4744.88,1033.86 ; U.Gnd@4785.51,1825 U.Gnd@4974.49,1825 ; v1(4800,4380) 4800,4350 4820,4330 ; C9.0@4910,3190 v1(4980,3190) ; U.Gnd@4974.49,1775 U.Gnd@4974.49,1825 ; v1(4980,2000) 4974.49,1994.49 U.Gnd@4974.49,1925 U.Gnd@4974.49,1875 U.Gnd@4974.49,1825 ; C7.0@4980,2600 v1(5050,2600) ; C8.0@5030,2880 v1(5100,2880) ; C26.0@5150,3350 5210,3350 v1(5220,3360) 5230,3350 C25.0@5290,3350 ; R36_18.0@5410,1560 5480,1490 v1(5620,1490) ; KEY1.2@5550,2200 5600,2150 v1(5620,2150) ; R36_2.0@5700,2980 R36_3.0@5810,2980 v1(5910,2980) ; KEY2.2@6070,2200 6110,2160 v1(6140,2160) ; v1(6220,3760) LED3.0@6330,3760 ; v1(7570,680) R47.0@7570,780 ; v1(8150,1120) R48.0@8150,1230 ; R50.0@8550,1300 8650,1300 v1(8670,1320)
  Top Layer w20: OSC2.Gnd@2640.79,2400 2650,2390.79 v1(2650,2290) ; v1(3260,2840) C13.0@3330,2840 ; 3860,2563.62 3863.19,2566.81 v1(3906.81,2566.81) ; 3880,3070 v1(3940,3010) ; v1@3903.62,2563.62 4057.48,2563.62 v1(4081.1,2540) 4257.95,2540 v1(4277.95,2560) ; v1(3930,2930) 3930,3000 v1(3940,3010) ; v1(4081.1,3030) 3960,3030 v1(3940,3010) ; 4277.95,2477.95 v1(4277.95,2560) ; 4277.95,3122.05 v1(4277.95,3042.05) 4287.6,3032.4 v1(4382.4,3032.4) ; v1(4380,2860) 4380,3030 v1(4382.4,3032.4) ; 4462.36,2642.36 v1(4390,2642.36) 4390,2580 v1(4370,2560) ; 4464.8,3114.8 v1(4382.4,3032.4) ; 4474.8,2455.2 v1(4370,2560) ; v1(4800,4380) 4800,4525.59 v1(4802.2,4527.8) ; Reg4.0@6920,1510 v1(6920,1430) v1(6990,1430) Reg4.0@6990,1520 ; C10.0@7180,1410 C29.0@7290,1410 v1(7290,1500) ; C33.0@7510,1730 C32.0@7620,1730 7630,1720 v1(7710,1720) ; v1(4277.95,2560) v1(4370,2560)
  Top Layer w24: Reg2.0@420,2200 v1(510,2200) v1(510,2270) Reg2.0@430,2270 ; C.0@980,2460 985,2465 Designator131.0@1180,2465 ; Reg3.0@2100,3280 v1(2100,3200) v1(2170,3200) Reg3.0@2170,3270 ; v1(2280,2630) 2280,2668.98 R54_1.0@2344.88,2733.86 2344.88,2804.88 2364.88,2824.88 R54_2.0@2364.88,2843.86 ; v1(3540,1930) 3600,1930 C17.0@3630,1960 ; 3839.21,2839.21 v1(3930,2930) ; v1(4050,960) C6.0@4200,960 ; v1@4081.1,3021.1 v1(4081.1,3030) 4081.1,3101.1 ; v1(4380,2860) 4440,2860 ; R23.0@4744.88,1143.86 R24.0@4744.88,1033.86 4846.14,1033.86 v1(4850,1030) ; v1(4770,150) 4780,160 C3.0@4850,160 C4.0@4960,160 C5.0@5070,160 5076.34,166.34 C14.3@5289.33,166.34 ; v1(6040,1050) C31.0@6040,1140 C34.0@6150,1140 C35.0@6260,1140 ; v1(8580,2980) Reg5.0@8670,2980 ; v1(8580,3050) 8660,3050 Reg5.0@8670,3040
  other v1: 740,3700 5077.8,4527.8
holder1: 
holder2: pad.0@142.05,2274.02
holder3: pad.0@140,4440
holder4: pad.0@3370.39,4439.37
holder5: pad.0@6640,3360
holder6: pad.0@8610,3360
holder7: pad.0@2570.39,194.02
holder8: pad.0@8610,210
NewNet1: pad.0@3440,2430 R62.0@3434.88,2343.86 R63.0@3270,2170 R64.0@3310,2280 U.VREF+ | length 734.4
  Top Layer w10: 3460,2480 3490,2510 3620,2510 3634.25,2524.25 U.VREF+@3734.65,2524.25
  Top Layer w16: R63.0@3270,2170 3270,2240 R64.0@3310,2280 3400,2280 3434.88,2314.88 R62.0@3434.88,2343.86 3434.88,2424.88 pad.0@3440,2430 3440,2460 3460,2480
NewNet2: Designator132.2 Q2.1@1920,2457 Q2.2 R60.0@1960,2720 | length 2239.7
  Top Layer w16: Q2.2@1920,2574 1920,2680 R60.0@1960,2720
  Top Layer w24: v1(1880,2310) 1920,2350 Q2.1@1920,2457
  Bottom Layer w16: Designator132.2@200,1930 230,1930 260,1960 260,2090 320,2150 650,2150 1720,2150 v1(1880,2310)
NewNet3: F3.1 R.1 | length 116.6
  Top Layer w24: F3.1@120,2490 120,2550 R.1@160,2590
NewNet4: C17.0@3630,2040 R55.0@3654.88,2153.86 R62.0@3514.88,2343.86 U.VDDA | length 910.7
  Top Layer w10: v1(3530,2450) 3570,2490 3580,2490 ; v1@3550,2460 3580,2490 ; U.VDDA@3734.65,2504.57 3644.57,2504.57 3630,2490 3580,2490
  Top Layer w16: R62.0@3514.88,2343.86 3530,2358.98 v1(3530,2450)
  Top Layer w20: v1(3580,2120) 3621.02,2120 3630,2128.98 ; C17.0@3630,2040 3630,2128.98 ; R55.0@3654.88,2153.86 3630,2128.98
  Bottom Layer w20: v1(3530,2450) 3580,2400 v1(3580,2120)
NewNet5: Designator128.1 F2.1 | length 4480.1
  Top Layer w24: F2.1@8310,3300 8320,3290 v1(8410,3290)
  Bottom Layer w24: Designator128.1@6470,1480 6480,1470 6480,1310 6740,1050 7630,1050 7850,1270 8260,1270 8580,1590 8580,2730 8460,2850 8460,3240 v1(8410,3290)
NewNet6: Designator82.2 F1.1 | length 1903.3
  Top Layer w24: v1(5120,4340) v1(5120,4270) 5140,4250 5140,3890 5410,3620 F1.1@6100,3620
  Bottom Layer w24: Designator82.2@4900,4140 4900,4190 4980,4270 v1(5120,4270) v1(5120,4340)
NewNet7: J.Vee R36_19.0@720,4210 | length 267.4
  Top Layer w16: J.Vee@640,4436.69 J.Vee@637.32,4439.37 637.32,4372.68 720,4290 R36_19.0@720,4210
NewNet8: Q1.1@1650,2565 Q1.2 R61.0@1736.14,2714.88 | length 252.2
  Top Layer w16: Q1.1@1650,2628.74 Q1.1@1650,2565 1725,2640 v1(1730,2640) 1736.14,2646.14 R61.0@1736.14,2714.88